# Altium PCB EVB_CAD_GC0308_V1.0.0.PcbDoc
Units mil, origin at the board's own origin, x right, y up, seen from the top; angles counter-clockwise.
Board outline 4220 x 4420 mil, 4 copper layers (Top, Inner Layer 2, Inner Layer 3, Bottom), stack 35.4 mil thick; 87 components, 82 nets, 247 pads, 224 vias.
Unrouted connection lines stored in the file: 165.
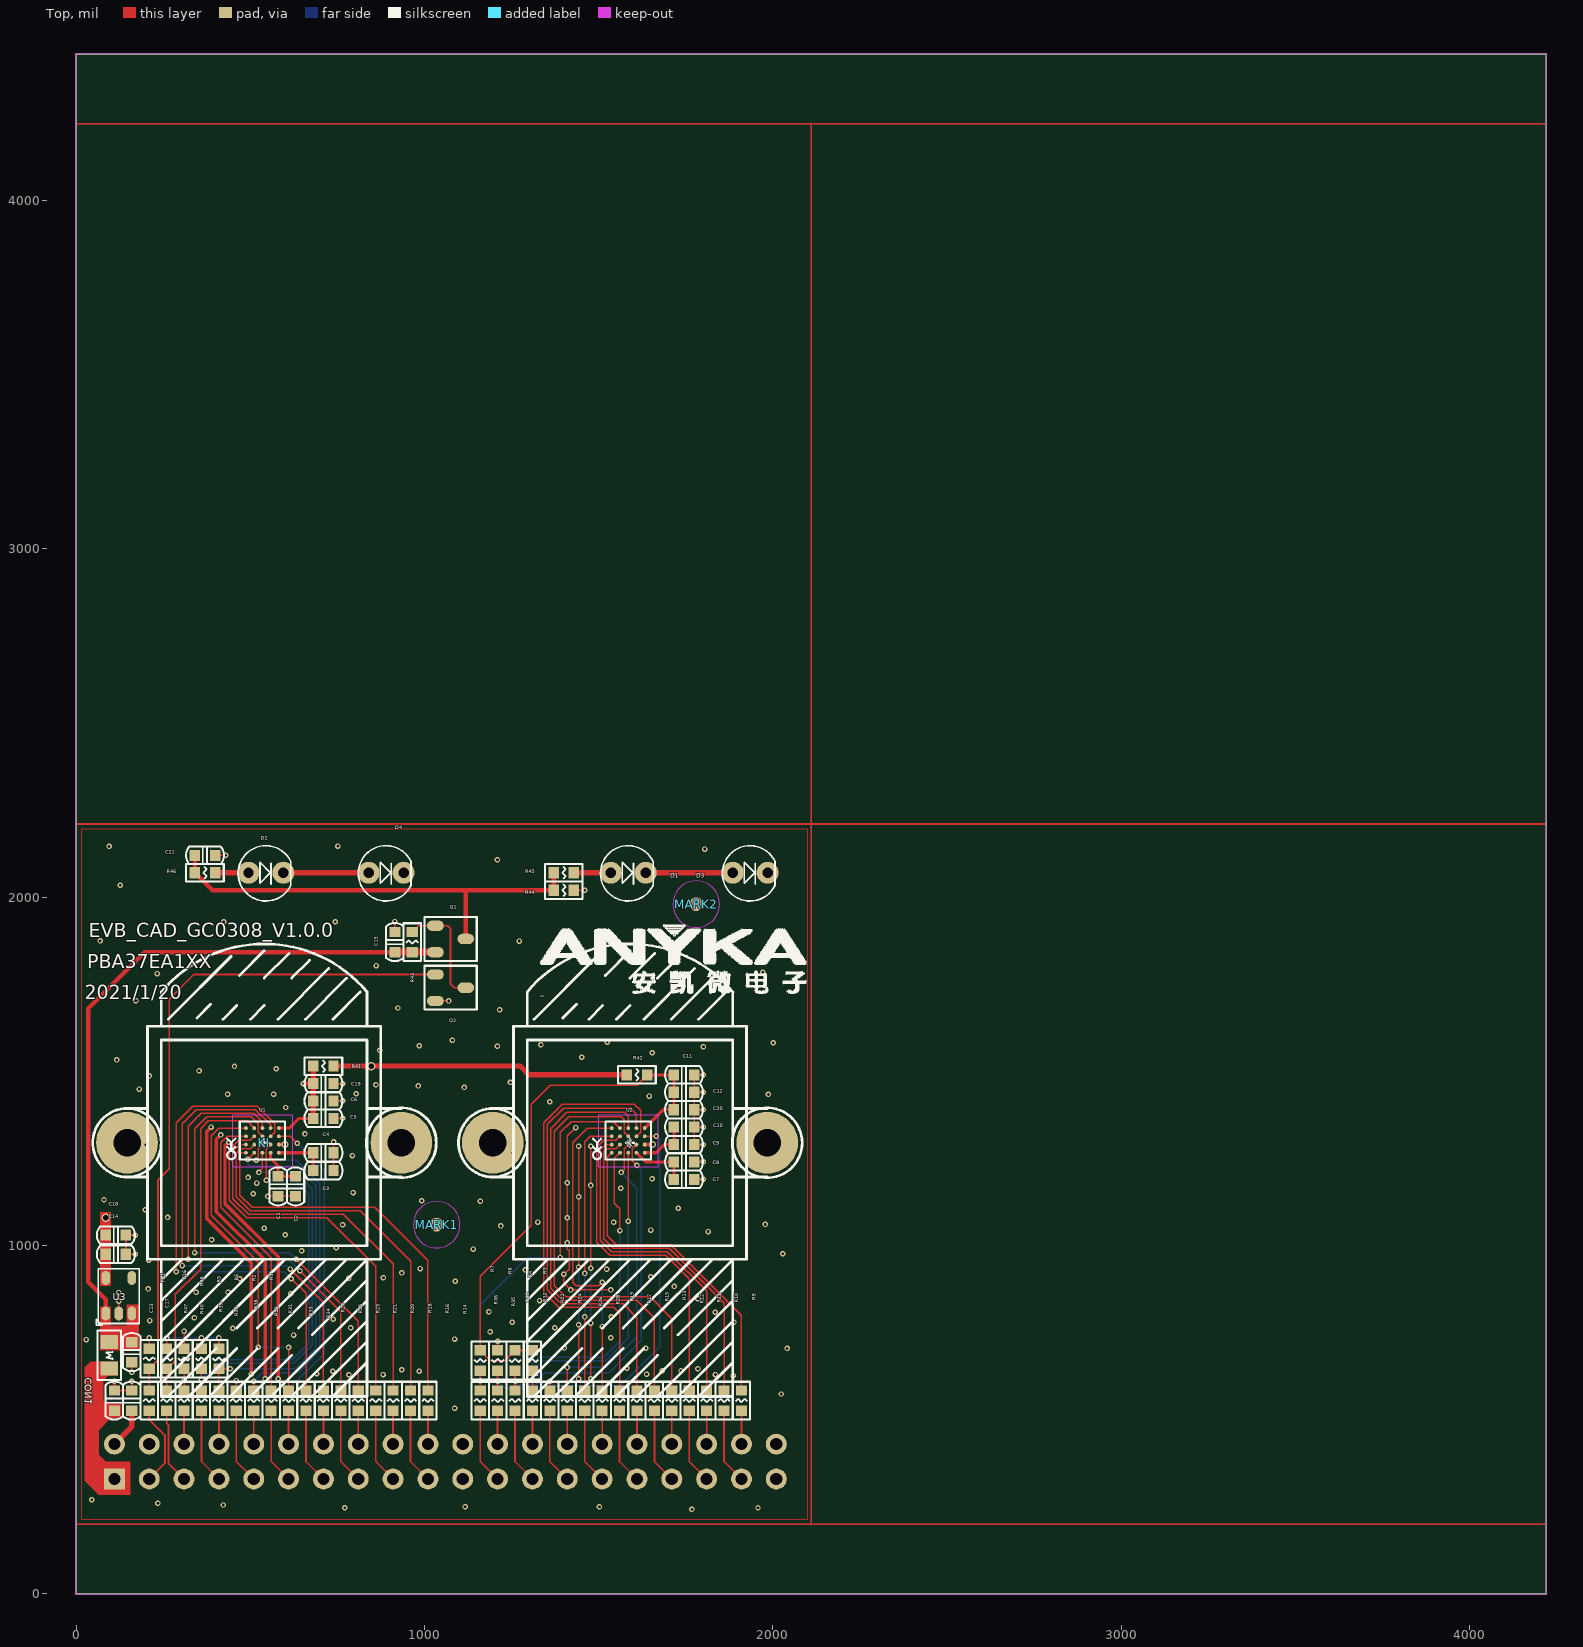
[diagram p0: Top view]
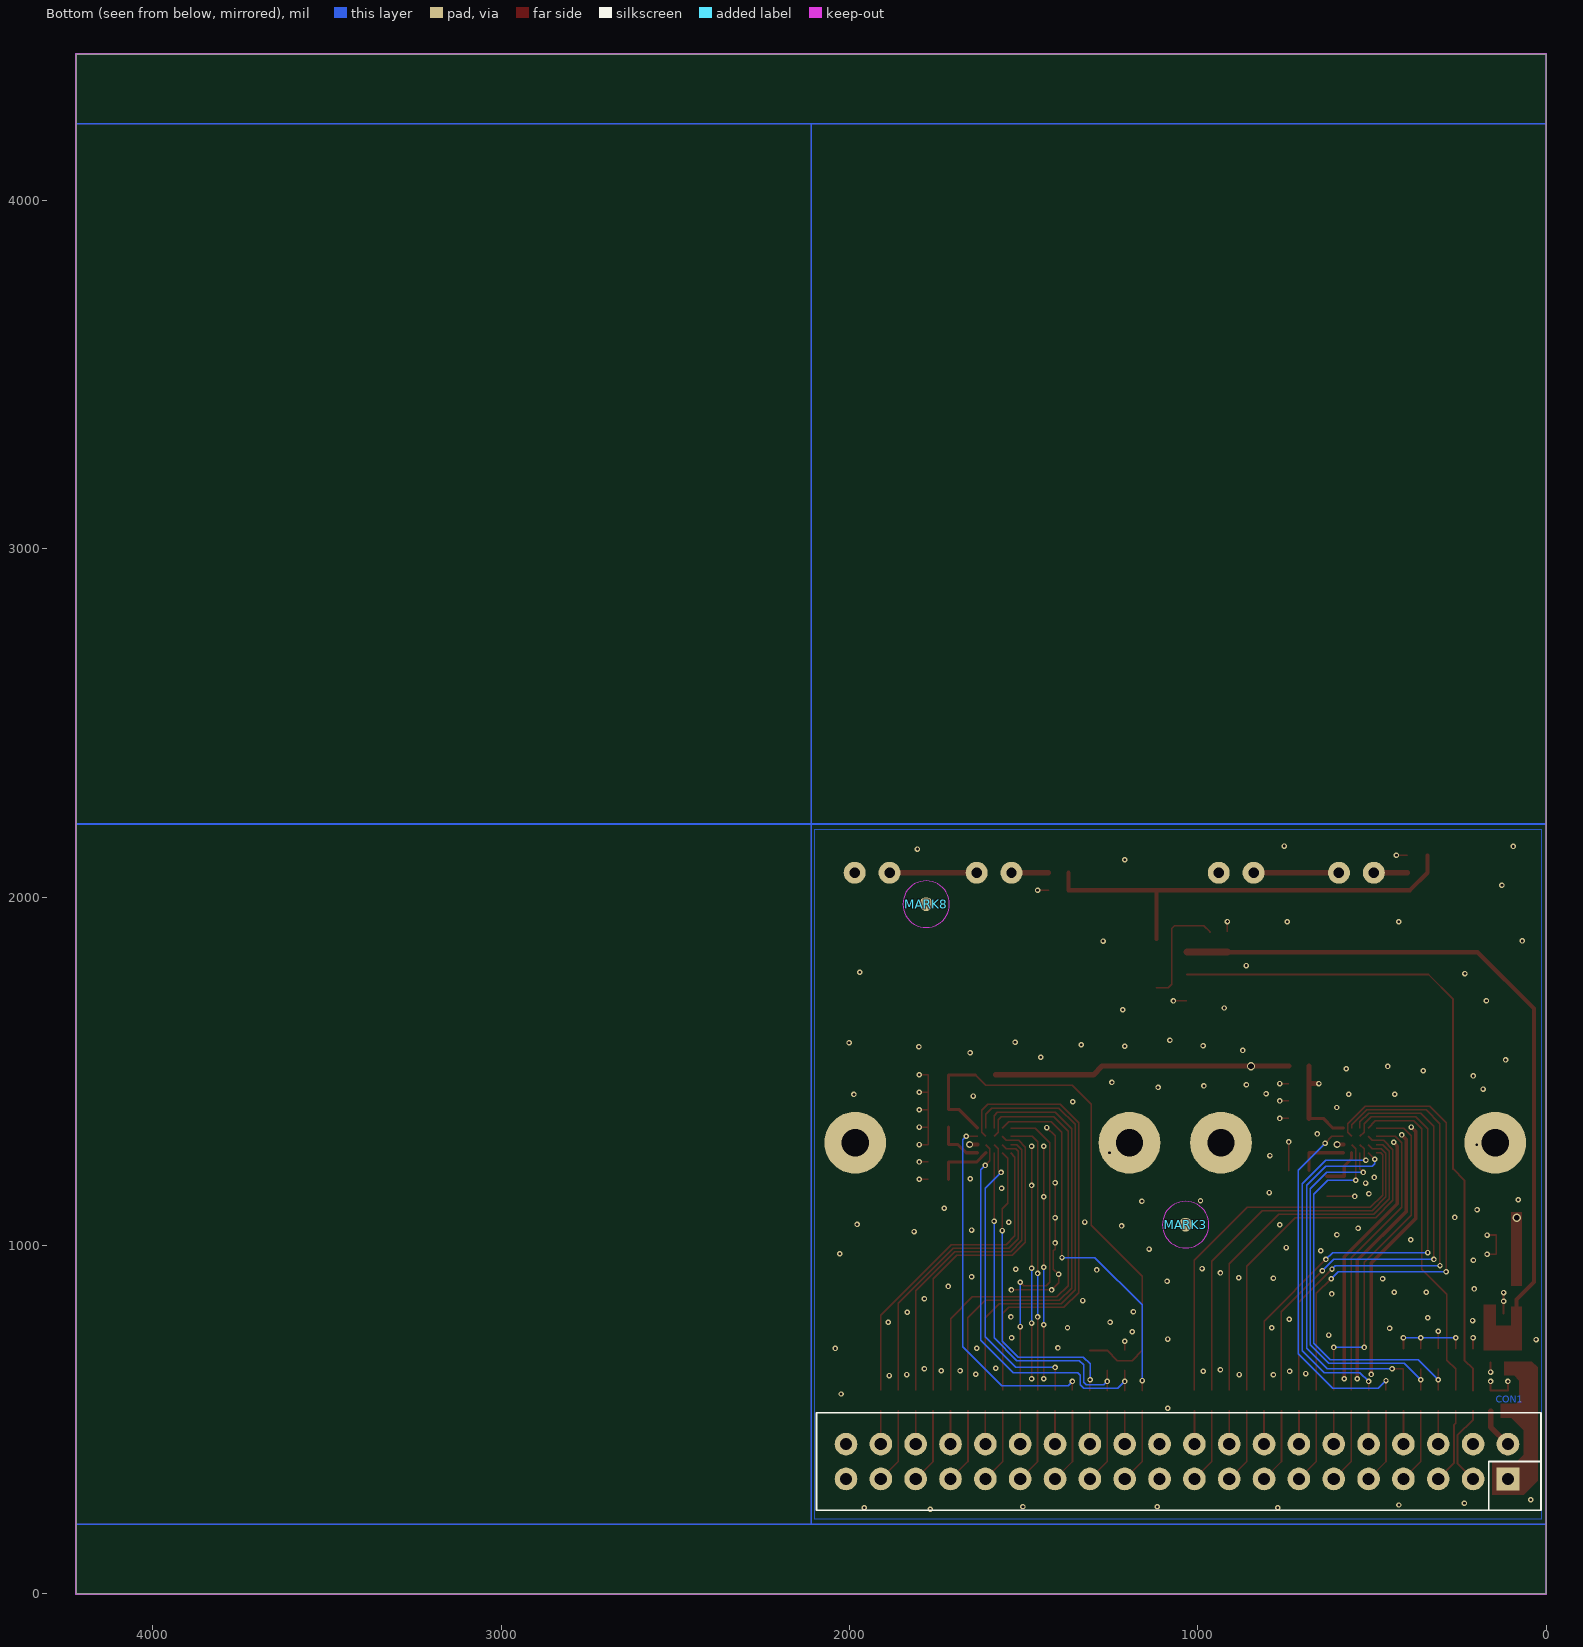
[diagram p1: Bottom view, seen from below]
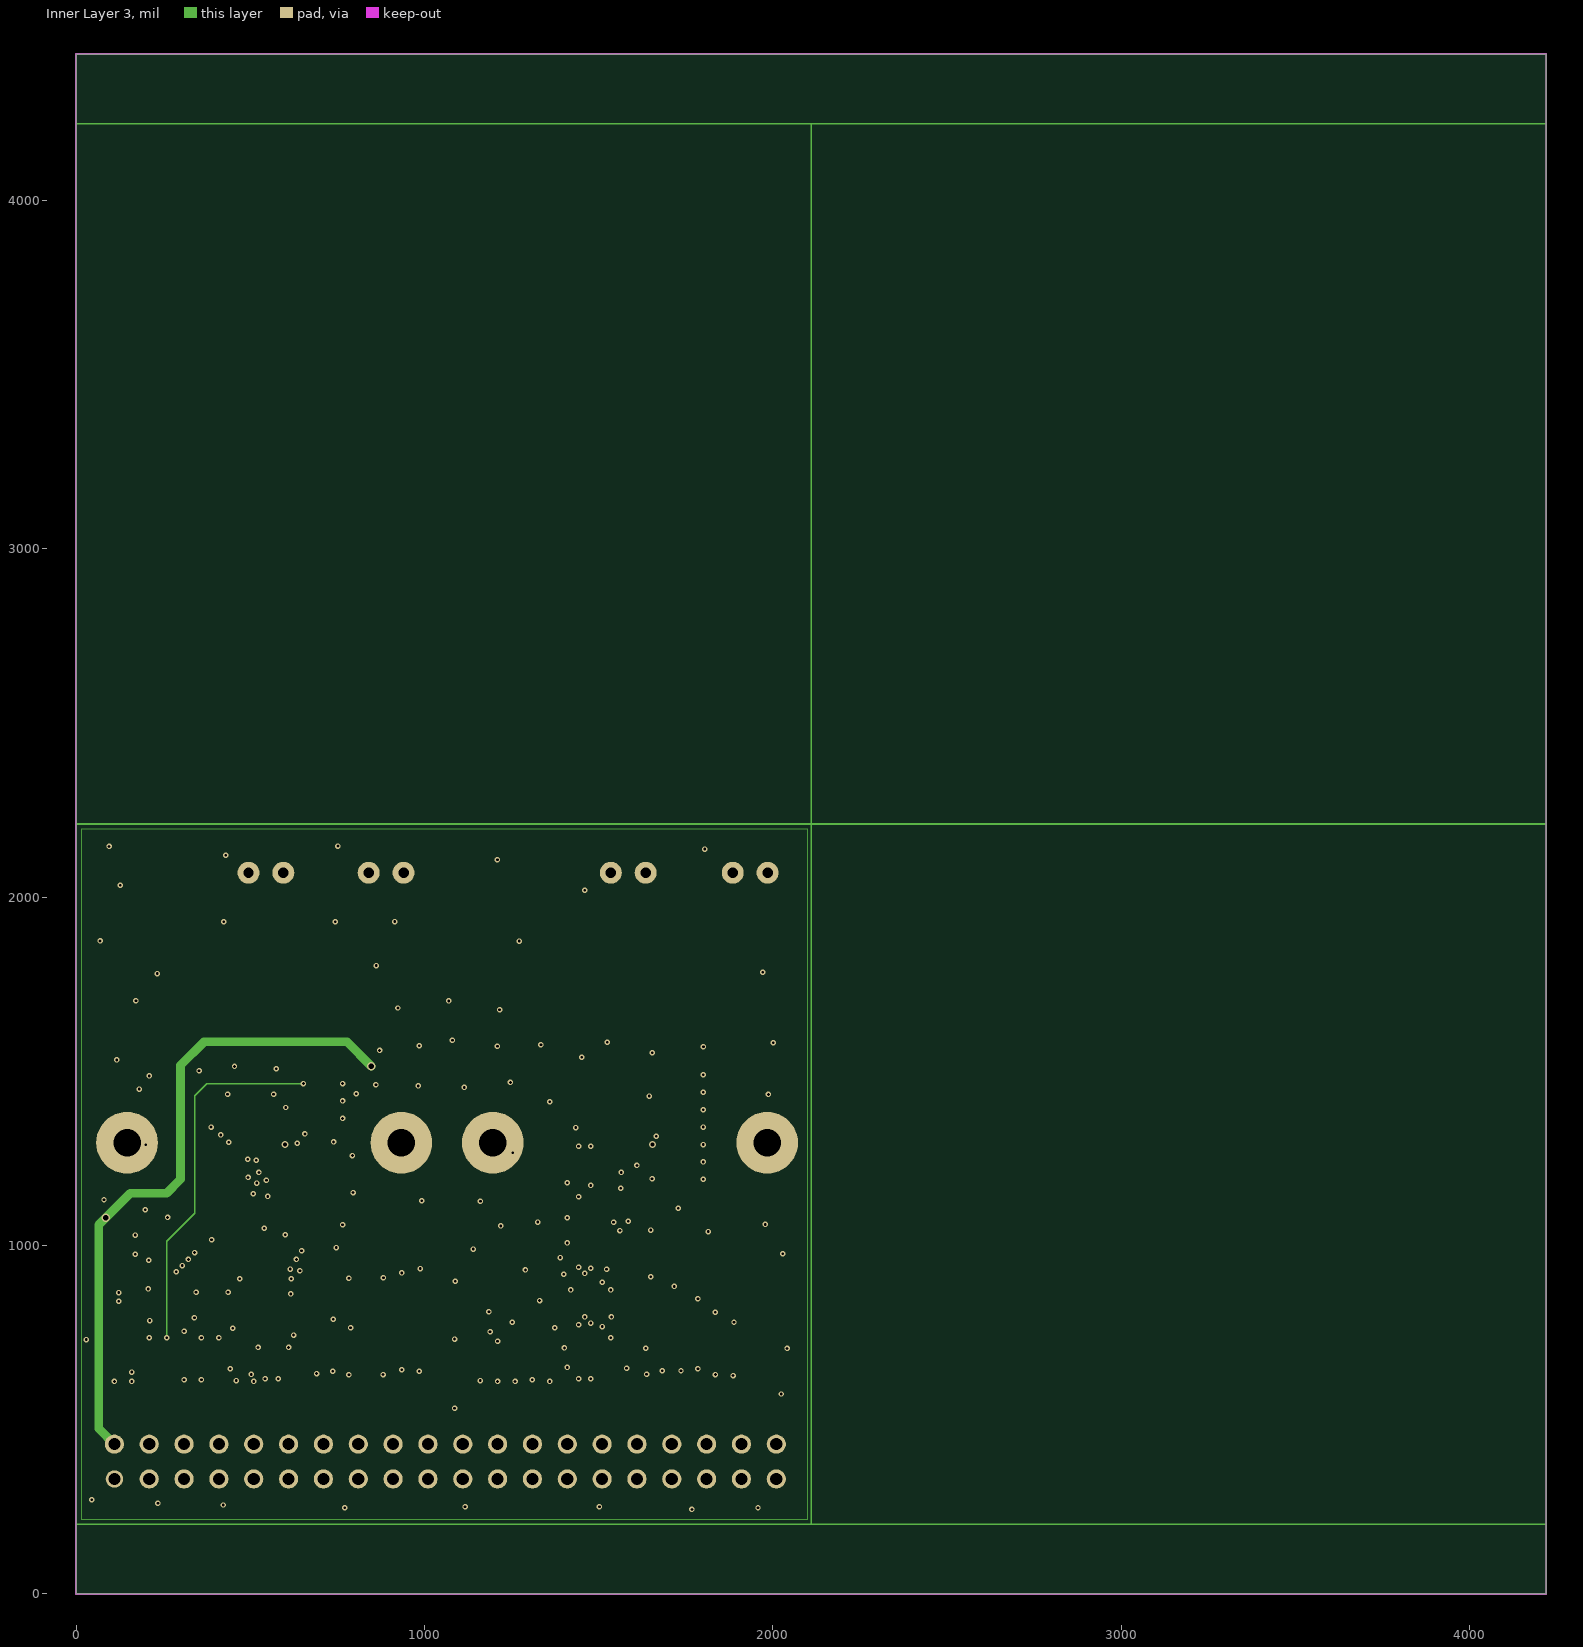
[diagram p2: Inner Layer 3]

## Layer stack, top to bottom
Solder Mask Top: solder mask 0.4, Solder Resist, Dk 3.5
Top: signal copper 1.35
Dielectric 1: dielectric 10, FR-4, Dk 4.3
Inner Layer 2: signal copper 1.35
Dielectric2: dielectric 10, FR-4, Dk 4.3
Inner Layer 3: signal copper 1.35
Dielectric3: dielectric 10, FR-4, Dk 4.3
Bottom: signal copper 1.35
Solder Mask Bottom: solder mask 0.4, Solder Resist, Dk 3.5

## Board outline
0,4420 4220,4420 4220,0 0,0

## Design rules (kind name [scope] priority, off if disabled: settings)
Clearance "Clearance - Default - DEFAULT- SMD" [IsVia vs IsSMTPin] p1: gap=0 ignorepadtopadclearanceinfootprint=FALSE
Clearance "Clearance - Default - DEFAULT - Via" [IsVia vs IsVia] p2: gap=0 ignorepadtopadclearanceinfootprint=FALSE
Clearance "Clearance - Default - DEFAULT - Net" [All] p3: gap=5 ignorepadtopadclearanceinfootprint=FALSE except(0: Arc-Hole Track-Hole SMDPad-Hole THPad-Hole Via-Hole Fill-Hole Poly-Hole Region-Hole Text-Hole; 4.5: Arc-SMDPad Track-SMDPad SMDPad-THPad; 8: THPad-Fill THPad-Poly THPad-Region Via-Fill Via-Poly Via-Region; 10: Arc-Text Track-Text SMDPad-Text THPad-Text Via-Text Fill-Text Poly-Text Region-Text Text-Text)
ComponentClearance "ComponentClearance - Default - DEFAULT" [All] p1: gap=0 collisioncheckmode=3 verticalgap=10 showdistances=FALSE
FanoutControl Fanout_Small [(CompPinCount < 5)] p3: bgadir=Out bgaviamode=Centered fanoutstyle=Auto fanoutdirection=OutThenIn viagrid=1 // Fanout_Small (Default Rule)
FanoutControl Fanout_SOIC [IsSOIC] p4: bgadir=Out bgaviamode=Centered fanoutstyle=Auto fanoutdirection=Alternating viagrid=1 // Fanout_SOIC (Default Rule)
HoleToHoleClearance "HoleToHoleClearance - Default - DEFAULT" [All] p1: gap=0 allowstackedmicrovias=TRUE
Length "Default Length" [All] p1: maxlimit=50000 minlimit=0
MaxMinImpedance "Default Impedance" [All] p1: minimum=50.00 maximum=150.0
ParallelSegment "Default Parallel Segment Adjasent" [All] p1: limit=1000 gap=200
ParallelSegment "Default Parallel Segment Same Layer" [All] p2: limit=1000 gap=200
PlaneConnect "Default PlaneConnect" [All] p1: planeconnectstyle=Direct reliefexpansion=20 reliefentries=4 reliefconductorwidth=15 reliefairgap=10
PolygonConnect "PolygonConnect - Default SMT" [IsSMTPin] p1: connectstyle=Direct reliefconductorwidth=15 reliefentries=4 polygonreliefangle="45 Angle" airgapwidth=10
PolygonConnect "PolygonConnect - Default Pad" [All] p2: connectstyle=Direct reliefconductorwidth=15 reliefentries=4 polygonreliefangle="45 Angle" airgapwidth=10
RoutingLayers "RoutingLayers - Default - DEFAULT" [All] p1: top layer_v5=TRUE mid layer 1_v5=TRUE mid layer 2_v5=TRUE bottom layer_v5=TRUE
RoutingPriority "RoutingPriority - Default - DEFAULT" [All] p1: routingpriority=3
RoutingTopology "Default Routing Topology" [All] p1: topology=Shortest
RoutingVias "RoutingVias - Default - DEFAULT" [All] p1: holewidth=7.87 width=15.75 viastyle="Through Hole" minholewidth=7.87 minwidth=15.75 maxholewidth=7.87 maxwidth=15.75
SMDToCorner "SMDToCorner - Default - DEFAULT" [All] p1: distance=0
SolderMaskExpansion [All] p1: expansion=4 istentingtop=FALSE
Width "Default Width" [All] p1: maxlimit=200 minlimit=4 preferedwidth=4
20 further rules are at their usual default settings.

## Components (designator, comment, footprint, x,y, rotation, side; value= is the part's Value field where it differs from the comment)
C1 "C0603" C0603 580,1170 r270 top
C2 "C0603" C0603 630,1170 r270 top
C3 "C0603" C0603 710,1215 r0 top
C4 "C0603" C0603 710,1266.26 r0 top
C5 "C0603" C0603 710,1365 r0 top
C6 "C0603" C0603 710,1415 r0 top
C7 "C0603" C0603 1745,1190 r0 top
C8 "C0603" C0603 1745,1240 r0 top
C9 "C0603" C0603 1745,1290 r0 top
C10 "C0603" C0603 1745,1340 r0 top
C11 "C0603" C0603 1745,1490 r0 top
C12 "C0603" C0603 1745,1440 r0 top
C13 "C0603" C0603 110,555 r270 top
C14 "C0603" C0603 114.2,975 r0 top
C15 "C0603" C0603 915,1871 r90 top
C16 "C0603" C0603 160,694 r270 top
C17 "C0603" C0603 160,555 r90 top
C18 "C0603" C0603 114.2,1030 r0 top
C19 "C0603" C0603 710,1465 r0 top
C20 "C0603" C0603 1745,1390 r0 top
C21 "C0603" C0603 370,2120 r0 top
CON1 "CON20X2_2MM54" CON20X2_2MM54 110,330 r0 top
D1 "LED_2MM54" LED_2MM54 1535,2070 r0 top
D2 "LED_2MM54" LED_2MM54 495,2070 r0 top
D3 "LED_2MM54" LED_2MM54 1885,2070 r0 top
D4 "LED_2MM54" LED_2MM54 840,2070 r0 top
FB1 "FB0805" FB0805 95,685 r270 top
K "CAMERA_COVER_YT0036A-HD+H20+IR0117" CAMERA_COVER_YT0036A-HD+H20+IR0117 1590,1295 r180 top
KI "CAMERA_COVER_YT0036A-HD+H20+IR0117" CAMERA_COVER_YT0036A-HD+H20+IR0117 540,1295 r180 top
MARK1 "MARK" MARK 1035,1060 r270 top
MARK2 "MARK" MARK 1780,1980 r270 top
MARK3 "MARK" MARK 1035,1060 r90 bottom
MARK8 "MARK" MARK 1780,1980 r90 bottom
Q1 "SOT23_GDS" SOT23_GDS 1075,1880 r270 top
Q2 "2N3904$2F$PMBT3904" 2N3904$2F$PMBT3904 1075,1740 r270 top
R1 "R0603" R0603 410,675 r90 top
R2 "R0603" R0603 360,675 r90 top
R3 "R0603" R0603 1310,670 r90 top
R4 "R0603" R0603 1260,670 r90 top
R5 "R0603" R0603 260,675 r90 top
R6 "R0603" R0603 310,675 r90 top
R7 "R0603" R0603 1160,670 r90 top
R8 "R0603" R0603 1210,670 r90 top
R9 "R0603" R0603 1910,555 r270 top
R10 "R0603" R0603 1860,555 r270 top
R11 "R0603" R0603 1810,555 r270 top
R12 "R0603" R0603 1760,555 r270 top
R13 "R0603" R0603 1710,555 r270 top
R14 "R0603" R0603 1010,555 r270 top
R15 "R0603" R0603 1660,555 r270 top
R16 "R0603" R0603 960,555 r270 top
R17 "R0603" R0603 1610,555 r270 top
R18 "R0603" R0603 910,555 r270 top
R19 "R0603" R0603 1560,555 r270 top
R20 "R0603" R0603 860,555 r270 top
R21 "R0603" R0603 810,555 r270 top
R22 "R0603" R0603 1360,555 r270 top
R23 "R0603" R0603 760,555 r270 top
R24 "R0603" R0603 1410,555 r270 top
R25 "R0603" R0603 710,555 r270 top
R26 "R0603" R0603 1460,555 r270 top
R27 "R0603" R0603 660,555 r270 top
R28 "R0603" R0603 1510,555 r270 top
R29 "R0603" R0603 460,555 r270 top
R30 "R0603" R0603 1260,555 r270 top
R31 "R0603" R0603 510,555 r270 top
R32 "R0603" R0603 1310,555 r270 top
R33 "R0603" R0603 560,555 r270 top
R34 "R0603" R0603 610,555 r270 top
R35 "R0603" R0603 1210,555 r270 top
R36 "R0603" R0603 1160,555 r270 top
R37 "R0603" R0603 360,555 r270 top
R38 "R0603" R0603 410,555 r270 top
R39 "R0603" R0603 310,555 r270 top
R40 "R0603" R0603 260,555 r270 top
R41 "R0603" R0603 710,1515 r180 top
R42 "R0603" R0603 1610,1490 r180 top
R43 "R0603" R0603 965,1871 r270 top
R44 "R0603" R0603 1400,2020 r180 top
R45 "R0603" R0603 1400,2070 r180 top
R46 "R0603" R0603 370,2070 r180 top
R47 "R0603" R0603 210,555 r270 top
R48 "R0603" R0603 210,675 r270 top
U1 "GC0308" GC0308 540,1295 r180 top
U2 "GC0308" GC0308 1590,1295 r180 top
U3 "LC1463CB5ATR18_SOT23-5" LC1463CB5ATR18_SOT23-5 122.6,855 r0 top
U4 "AK2020_LOGO" AK2020_LOGO 1333,1712.5 r0 top

## Footprints (in the part's own frame and the unit in brackets; to place one, negate y for a bottom-side part, rotate by r counter-clockwise, add the part's x,y. Pads: shape width x height; smd on the part's side, far side on the other; paste and mask are expansions set on the pad)
2N3904$2F$PMBT3904 [mil]
  oval 30x48 smd: B(-38,-43.5) C(0,43.5) E(38,-43.5)
  silkscreen extent -63,-75 63,75
AK2020_LOGO [mil]
  silkscreen extent 0,12 764,208
C0603 [mil]
  rect 30x32 smd: 1(-29,0) 2(29,0)
  silkscreen extent -55,-25 55,25
CAMERA_COVER_YT0036A-HD+H20+IR0117 [mm]
  round 4.5 hole 2: 1(-10,0) 2(10,0)
  silkscreen extent -12.55,-14.5 12.5,18.5
CON20X2_2MM54 [mil]
  rect 60x60 / inner round 50 / far side rect 65x65 hole 35: 1(0,0)
  round 60 / inner round 55 / far side round 65 hole 35: 2(0,100) 3(100,0) 4(100,100) 5(200,0) 6(200,100) 7(300,0) 8(300,100) 9(400,0) 10(400,100) 11(500,0) 12(500,100) 13(600,0) 14(600,100) 15(700,0) 16(700,100) 17(800,0) 18(800,100) 19(900,0) 20(900,100) 21(1000,0) 22(1000,100) 23(1100,0) 24(1100,100) 25(1200,0) 26(1200,100) 27(1300,0) 28(1300,100) 29(1400,0) 30(1400,100) 31(1500,0) 32(1500,100) 33(1600,0) 34(1600,100) 35(1700,0) 36(1700,100) 37(1800,0) 38(1800,100) 39(1900,0) 40(1900,100)
FB0805 [mil]
  rect 40x50 smd: 1(-38,0) 2(38,0)
  silkscreen extent -71,-34 71,34
GC0308 [mm]
  round 0.28 smd: A1(-1.07,0.73) A2(-0.47,0.73) A3(0.13,0.73) A4(0.73,0.73) A5(1.33,0.73) B1(-1.07,0.13) B2(-0.47,0.13) B3(0.13,0.13) B4(0.73,0.13) B5(1.33,0.13) C1(-1.07,-0.47) C2(-0.47,-0.47) C3(0.13,-0.47) C4(0.73,-0.47) C5(1.33,-0.47) D1(-1.07,-1.07) D2(-0.47,-1.07) D3(0.13,-1.07) D4(0.73,-1.07) D5(1.33,-1.07)
  silkscreen extent -1.52,-1.55 2.7,1.21
LC1463CB5ATR18_SOT23-5 [mil]
  oval 25x40 smd: 1(-37.4,-50) 2(0,-50) 3(37.4,-50) 4(37.4,51.97) 5(-37.4,51.97)
  silkscreen extent -65,-84 59,79
LED_2MM54 [mm]
  round 1.6 hole 0.762: A(0,0) K(2.54,0)
  silkscreen extent -0.76,-2.06 3.08,1.98
MARK [mm]
  round 1 smd: 1(0,0)
  Top keep-out region: 1.7,0 1.571,0.651 1.202,1.202 0.651,1.571 0,1.7 0,1.7 -0.651,1.571 -1.202,1.202 -1.571,0.651 -1.7,0 -1.7,0 -1.571,-0.651 -1.202,-1.202 -0.651,-1.571 0,-1.7 0,-1.7 0.651,-1.571 1.202,-1.202 1.571,-0.651 1.7,0
R0603 [mil]
  rect 30x32 smd: 1(-29,0) 2(29,0)
  silkscreen extent -54,-25 54,25
SOT23_GDS [mil]
  oval 30x48 smd: D(0,43.5) G(-38,-43.5) S(38,-43.5)
  silkscreen extent -63,-75 63,75

## Via types
v1: diameter 15.75, hole 7.87, Top to Bottom, 220 vias
v2: diameter 24, hole 16, Top to Bottom, 2 vias
v3: diameter 20, hole 12, Top to Bottom, 2 vias

## Nets (pads, with @x,y where several pads share a name; then routed paths per layer and width w, separated by ;. In a path a pad name is that pad's centre, name@x,y a point inside that pad or via, vN(x,y) a via of type N, cw(c..) or ccw(c..) an arc to the next point about the centre after c; other vN are vias at no path point)
C0_AVDD25: C3.1 C4.1 U1.A1 | length 150.1
  Top w9: U1.A1 646,1266.26 C4.1 C3.1
C0_D0: R27.1 U1.C2 | length 1468.8
  Top w4: v1(287.5,925) 287.5,1352.5 335,1400 520,1400 570.3,1349.7 570.3,1325.3 U1.C2 ; v1(617.5,905) 660,862.5 R27.1
  Bottom w4: v1(287.5,925) 597.5,925 v1(617.5,905)
C0_D1: R25.1 U1.D2 | length 1407
  Top w4: v1(305,942.5) 305,1350 345,1390 515,1390 558.5,1346.5 U1.D2 ; v1(615,932.5) 710,837.5 R25.1
  Bottom w4: v1(305,942.5) 605,942.5 v1(615,932.5)
C0_D2: R23.1 U1.D3 | length 1364.3
  Top w4: v1(322.5,960) 322.5,1342.5 360,1380 510,1380 534.88,1355.12 U1.D3 ; v1(642.5,927.5) 760,810 R23.1
  Bottom w4: v1(322.5,960) 610,960 v1(642.5,927.5)
C0_D3: R21.1 U1.C3 | length 1352.2
  Top w4: v1(340,980) 340,1335 375,1370 502.5,1370 523,1349.5 523,1325.39 U1.C3 ; v1(632.5,960) 810,782.5 R21.1
  Bottom w4: v1(340,980) 612.5,980 v1(632.5,960)
C0_D4: R20.1 U1.C4 | length 1086.9
  Top w4: U1.C4 499.51,1301.75 466.75,1301.75 440,1275 440,1130 490,1080 720,1080 860,940 R20.1
C0_D5: R18.1 U1.B5 | length 1082
  Top w4: U1.B5 469.88,1289.88 450,1270 450,1135 495,1090 767.5,1090 910,947.5 R18.1
C0_D6: R16.1 U1.B4 | length 1134.2
  Top w4: U1.B4 499.38,1278 473,1278 460,1265 460,1140 500,1100 815,1100 960,955 R16.1
C0_D7: R14.1 U1.A5 | length 1127.2
  Top w4: U1.A5 475,1266.26 470,1261.26 470,1145 505,1110 857.64,1110 1010,957.64 R14.1
C0_DVDD: C5.1 C6.1 C19.1 R1.2 R2.2 R5.2 R41.2 U1.D1 | length 1587.1
  Top w5: R5.2 v1(260,735) ; R2.2 v1(360,735) ; R1.2 v1(410,735)
  Top w9: U1.D1 612.13,1337.13 640,1365 C5.1
  Top w15: v1(652.5,1465) C19.1 ; C5.1 C6.1 C19.1 ; R41.2 C19.1
  Inner Layer 3 w4: v1(260,735) 260,1012.5 340,1092.5 340,1430 375,1465 v1(652.5,1465)
  Bottom w5: v1(260,735) v1(360,735) v1(410,735)
C0_HSYNC: R31.1 U1.B3 | length 994.8
  Top w4: R31.1 v1(510,610) ; v1(517.5,1245) 523,1250.5 523,1277.55 534.88,1289.43 U1.B3
  Bottom w4: v1(510,610) 535,635 637.5,635 700,697.5 700,1177.5 632.5,1245 v1(517.5,1245)
C0_PCLK: R33.1 U1.C5 | length 851.4
  Top w4: U1.C5 433.5,1313.5 415,1295 415,1110 560,965 R33.1
C0_PWDN: R6.1 R39.1 U1.B2 | length 1135.4
  Top w4: R39.1 v1(310,615) R6.1 ; v1(546.5,1187.5) 546.5,1277.88 U1.B2
  Bottom w4: v1(310,615) 367.5,672.5 620,672.5 667.5,720 667.5,1147.5 627.5,1187.5 v1(546.5,1187.5)
C0_RESET: R5.1 R40.1 U1.D4 | length 963.5
  Top w4: R40.1 R5.1 284,670 285,670 285,860 357.5,932.5 357.5,1335 380,1357.5 490.89,1357.5 U1.D4
C0_SCL: R1.1 R38.1 U1.A4 | length 1091.4
  Top w4: R38.1 R1.1 v1(442.5,646) ; v1(492.5,1247.5) U1.A4
  Bottom w4: v1(442.5,646) 628.5,646 687.5,705 687.5,1172.5 632.5,1227.5 500,1227.5 492.5,1235 v1(492.5,1247.5)
C0_SCLK: R34.1 U1.D5 | length 983.7
  Top w4: U1.D5 409.63,1337.13 387.5,1315 387.5,1087.5 522.5,952.5 v1(522.5,707.5) ; R34.1 v1(610,707.5)
  Bottom w4: v1(522.5,707.5) v1(610,707.5)
C0_SDA: R2.1 R37.1 U1.A3 | length 1100.9
  Top w4: R37.1 v1(360,615) R2.1 ; v1(525,1210) 534.88,1219.88 U1.A3
  Bottom w4: v1(360,615) 407.5,662.5 625,662.5 677.5,715 677.5,1162.5 630,1210 v1(525,1210)
C0_VREF: C1.1 C2.1 U1.A2 | length 126.2
  Top w9: U1.A2 558.5,1250 580,1228.5 C1.1 C2.1
C0_VSYNC: R29.1 U1.C1 | length 1028.5
  Top w4: R29.1 v1(460,612.5) ; U1.C1 615,1313.5 v1(635,1293.5)
  Bottom w4: v1(460,612.5) 482.5,590 612.5,590 712.5,690 712.5,1216 v1(635,1293.5)
C1_AVDD25: C9.1 C10.1 U2.A1 | length 143.7
  Top w9: U2.A1 1665,1266.26 1688.74,1290 C9.1 C10.1
C1_D0: R19.1 U2.C2 | length 1338.6
  Top w4: R19.1 1560,806 1543.5,822.5 1385,822.5 1342.5,865 1342.5,1353 1395.5,1406 1602.5,1406 1620.2,1388.3 1620.2,1325.2 U2.C2
C1_D1: R17.1 U2.D2 | length 1297
  Top w4: U2.D2 1608.5,1377.5 1591.5,1394.5 1399.5,1394.5 1352.5,1347.5 1352.5,872.5 1392.5,832.5 1570,832.5 1610,792.5 R17.1
C1_D2: R15.1 U2.D3 | length 1280.2
  Top w4: U2.D3 1584.88,1372.5 1575.38,1382 1409,1382 1362.5,1335.5 1362.5,877.5 1397.5,842.5 1610,842.5 1660,792.5 R15.1
C1_D3: R13.1 U2.C3 | length 1298.8
  Top w4: U2.C3 1573.1,1325.29 1573.1,1360.9 1565,1369 1414,1369 1372.5,1327.5 1372.5,885 1405,852.5 1647.5,852.5 1710,790 R13.1
C1_D4: R12.1 U2.C4 | length 981.1
  Top w4: U2.C4 1549.76,1302 1514.5,1302 1495,1282.5 1495,1010 1532.5,972.5 1692.5,972.5 1760,905 R12.1
C1_D5: R11.1 U2.B5 | length 949.9
  Top w4: U2.B5 1519.88,1289.88 1505,1275 1505,1015 1537.5,982.5 1697.5,982.5 1810,870 R11.1
C1_D6: R10.1 U2.B4 | length 977.1
  Top w4: U2.B4 1549.38,1278 1523,1278 1515,1270 1515,1020 1542.5,992.5 1702.5,992.5 1860,835 R10.1
C1_D7: R9.1 U2.A5 | length 939.2
  Top w4: U2.A5 1525,1253.62 1525,1027.5 1550,1002.5 1707.5,1002.5 1910,800 R9.1
C1_DVDD: C11.1 C12.1 C20.1 R3.2 R4.2 R7.2 R42.1 U2.D1 | length 1591.5
  Top w4: R4.2 1231,670 1189,670 R7.2 1160,912 1306,1058 1306,1405 1361,1460 1609,1460 R42.1
  Top w5: R4.2 R3.2
  Top w9: U2.D1 1685,1390 C20.1 C12.1 C11.1 R42.1
C1_HSYNC: R24.1 U2.B3 | length 881.5
  Top w4: R24.1 v1(1410,650) ; v1(1565,1210) 1573,1218 1573,1278 U2.B3
  Bottom w4: v1(1410,650) 1522.5,650 1610,737.5 1610,1165 v1(1565,1210)
C1_PCLK: R26.1 U2.C5 | length 797.8
  Top w4: R26.1 v1(1460,795) ; v1(1460,920) 1460,1297.5 1476,1313.5 U2.C5
  Bottom w4: v1(1460,795) v1(1460,920)
C1_PWDN: R8.1 R35.1 U2.B2 | length 1128.8
  Top w4: U2.B2 1596.75,1278.13 1596.75,1243.25 v1(1610,1230)
  Top w5: R35.1 v1(1210,610) R8.1
  Bottom w4: v1(1210,610) 1230,590 1327.5,590 1337.5,600 1337.5,627.5 1345,635 1530,635 1622.5,727.5 1622.5,1217.5 v1(1610,1230)
C1_RESET: R7.1 R36.1 U2.D4 | length 1112
  Top w4: v1(1390,965.5) 1390,1325 1421,1356 1542.39,1356 U2.D4
  Top w5: R36.1 v1(1160,612.5) R7.1
  Bottom w4: v1(1160,612.5) 1160,830 1295.5,965.5 v1(1390,965.5)
C1_SCL: R3.1 R32.1 U2.A4 | length 934.8
  Top w4: v1(1561.26,1043) 1561.26,1105 1545,1121.26 1545,1250 U2.A4
  Top w5: R32.1 R3.1
  Bottom w4: v1(1309.5,615) 1309.5,660 1329.5,680 1515.26,680 1561.26,726 v1(1561.26,1043)
C1_SCLK: R28.1 U2.D5 | length 934.4
  Top w4: R28.1 v1(1510,767.5) ; v1(1510,895) 1500,885 1435,885 1425,895 1425,1295 1467.13,1337.13 U2.D5
  Bottom w4: v1(1510,767.5) v1(1510,895)
C1_SDA: R4.1 R30.1 U2.A3 | length 1002.6
  Top w4: v1(1584.88,1070) U2.A3
  Top w5: R30.1 v1(1260,610) R4.1
  Bottom w4: v1(1260,610) 1270,600 1320,600 1327.5,607.5 1327.5,657.5 1340,670 1520,670 1584.88,734.88 v1(1584.88,1070)
C1_VREF: C7.1 C8.1 U2.A2 | length 168.4
  Top w9: U2.A2 1634.76,1240 C8.1 C7.1
C1_VSYNC: R22.1 U2.C1 | length 1033.3
  Top w4: R22.1 v1(1360,610) ; U2.C1 v1(1665,1313.5)
  Bottom w4: v1(1360,610) 1372.5,597.5 1562.5,597.5 1675,710 1675,1303.5 v1(1665,1313.5)
CSI0_D0: CON1.13 R27.2 | length 216.7
  Top w5: R27.2 660,380 CON1.13
CSI0_D1: CON1.14 R25.2 | length 96
  Top w5: CON1.14 R25.2
CSI0_D2: CON1.15 R23.2 | length 216.7
  Top w5: R23.2 760,380 CON1.15
CSI0_D3: CON1.16 R21.2 | length 96
  Top w5: CON1.16 R21.2
CSI0_D4: CON1.17 R20.2 | length 216.7
  Top w5: R20.2 860,380 CON1.17
CSI0_D5: CON1.18 R18.2 | length 96
  Top w5: CON1.18 R18.2
CSI0_D6: CON1.19 R16.2 | length 216.7
  Top w5: R16.2 960,380 CON1.19
CSI0_D7: CON1.20 R14.2 | length 96
  Top w5: CON1.20 R14.2
CSI0_HSYNC: CON1.10 R31.2 | length 96
  Top w5: CON1.10 R31.2
CSI0_I2C_SCL: CON1.8 R38.2 | length 96
  Top w5: CON1.8 R38.2
CSI0_I2C_SDA: CON1.7 R37.2 | length 216.7
  Top w5: R37.2 360,380 CON1.7
CSI0_PCLK: CON1.11 R33.2 | length 216.7
  Top w5: R33.2 560,380 CON1.11
CSI0_PDWN: CON1.6 R39.2 | length 96
  Top w5: CON1.6 R39.2
CSI0_REST: CON1.5 R40.2 | length 216.7
  Top w5: R40.2 260,490 265,485 265,375 CON1.5
CSI0_SCLK: CON1.12 R34.2 | length 96
  Top w5: CON1.12 R34.2
CSI0_VSYNC: CON1.9 R29.2 | length 216.7
  Top w5: R29.2 460,380 CON1.9
CSI1_D0: CON1.31 R19.2 | length 216.7
  Top w5: R19.2 1560,380 CON1.31
CSI1_D1: CON1.32 R17.2 | length 96
  Top w5: CON1.32 R17.2
CSI1_D2: CON1.33 R15.2 | length 216.7
  Top w5: R15.2 1660,380 CON1.33
CSI1_D3: CON1.34 R13.2 | length 96
  Top w5: CON1.34 R13.2
CSI1_D4: CON1.35 R12.2 | length 216.7
  Top w5: R12.2 1760,380 CON1.35
CSI1_D5: CON1.36 R11.2 | length 96
  Top w5: CON1.36 R11.2
CSI1_D6: CON1.37 R10.2 | length 216.7
  Top w5: R10.2 1860,380 CON1.37
CSI1_D7: CON1.38 R9.2 | length 96
  Top w5: CON1.38 R9.2
CSI1_HSYNC: CON1.28 R24.2 | length 96
  Top w5: CON1.28 R24.2
CSI1_I2C_SCL: CON1.26 R32.2 | length 96
  Top w5: CON1.26 R32.2
CSI1_I2C_SDA: CON1.25 R30.2 | length 216.7
  Top w5: R30.2 1260,380 CON1.25
CSI1_PCLK: CON1.29 R26.2 | length 216.7
  Top w5: R26.2 1460,380 CON1.29
CSI1_PDWN: CON1.24 R35.2 | length 96
  Top w5: CON1.24 R35.2
CSI1_REST: CON1.23 R36.2 | length 216.7
  Top w5: R36.2 1160,380 CON1.23
CSI1_SCLK: CON1.30 R28.2 | length 96
  Top w5: CON1.30 R28.2
CSI1_VSYNC: CON1.27 R22.2 | length 216.7
  Top w5: R22.2 1360,380 CON1.27
GND: C1.2 C2.2 C3.2 C4.2 C5.2 C6.2 C7.2 C8.2 C9.2 C10.2 C11.2 C12.2 C13.1 C14.2 C15.2 C16.2 C17.2 C18.2 C19.2 C20.2 C21.2 CON1.21 CON1.22 CON1.39 CON1.40 D3.K D4.K K.1 K.2 KI.1 KI.2 Q2.E R6.2 R8.2 R44.1 R48.1 U1.B1 U2.B1 U3.2 | length 5433.3
  Top w4: R6.2 v1(310,754) ; v1(550,1141) C1.2 C2.2 ; C4.2 v1(739,1297.5) ; C5.2 v1(765,1365) ; C6.2 v1(765,1415) ; C19.2 v1(765,1465) ; C15.2 v1(915,1930) ; Q2.E v1(1070,1702) ; R8.2 v1(1210,725) ; v1(1434.13,1338.64) 1410,1314.51 v1(1410,1180) v1(1410,1080) v1(1410,1007.5) 1410,990 1415,985 1415,932.5 v1(1400,917.5) 1400,892.5 v1(1420,872.5) v1(1535,872.5) ; v1(1442.5,617.5) v1(1442.5,772.5) ; v1(1442.5,937.5) v1(1442.5,1140) v1(1442.5,1285) ; v1(1477.5,617.5) v1(1477.5,777.5) ; v1(1477.5,935) v1(1477.5,1172.5) v1(1477.5,1285) ; C7.2 v1(1800,1190) ; C8.2 v1(1800,1240) ; v1(1800,1290) C9.2 C10.2 ; v1(1800,1340) C10.2 ; v1(1800,1390) C20.2 ; v1(1800,1440) C12.2 ; v1(1800,1490) C11.2 C12.2 ; C10.2 C20.2 ; C20.2 C12.2
  Top w5: v1(110,610) C13.1 C17.2 v1(160,610) ; U3.2 v1(122.6,840) v1(122.6,865) ; v1(160,637) C16.2 ; v1(170,975) C14.2 C18.2 v1(170,1030) ; R48.1 v1(210,735) ; C21.2 v1(430,2120) ; C3.2 C4.2 ; R44.1 v1(1460,2020)
  Top w10: KI.2@199.69,1275.31 v1(199.75,1289) ; v1(387.5,1340) 375,1327.5 375,1320 375,1077.5 502.5,950 v1(502.5,630) ; v1(415,1317.5) 402.5,1305 402.5,1097.5 542.5,957.5 v1(542.5,617.5) ; v1(438.1,1296.32) 427.5,1285.72 427.5,1120 580,967.5 v1(580,617.5)
  Top w12: U1.B1 v3(600,1289.88) ; U2.B1 v3(1655,1289.88)
  Bottom w4: v1(1442.5,772.5) v1(1442.5,937.5) ; v1(1477.5,777.5) v1(1477.5,935)
  other v1: 1767.87,242.54 770.87,247.35 1957.43,247.57 1116.54,250.55 1502.22,250.55 422.8,255.27 235,260 44.84,270.11 1086.3,533.23 2024.06,573.9 1885.73,626.81 783.16,629.21 881.27,629.75 1637.63,630.44 1835.33,629.61 690.45,632.45 736.8,638.92 984.76,639.46 1682.44,640.5 1736.38,640.81 935.17,643.23 1784.92,646.41 1580.03,647.81 1635,705 2040.79,704.74 1401.71,706.14 29.12,730.13 1086.3,731.59 1534.77,735.41 624.4,742.93 1188.44,752.83 449.65,762.76 788.01,763.97 1374.2,764.03 1251.92,779.9 1888.53,779.9 211.43,784.64 737.88,788.23 339.82,792.57 1536.73,794.96 1834.39,808.83 1185,810 1330.29,842.16 1784.92,847.11 615.9,861 344.29,865.94 436.43,865.72 206.97,875.36 1716.78,882.58 1088.56,897.51 470,905 783.09,906.34 882.35,907.9 1649.57,910.58 935.17,921.37 1290,930 1522.62,932.05 988,933.77 208.95,957.65 2028.25,976.52 647.12,985.35 1140,990 746.57,994.3 388.9,1016.64 600.78,1031.02 1814.72,1040.22 1649.72,1044.28 540.3,1049.55 1219.03,1056.3 765,1060 1978.19,1060.64 1325,1067.5 1542.83,1067.04 262.8,1080.72 198.69,1102.86 1728.15,1106.87 1160.65,1126.97 992.46,1128.3 80.18,1131.61 508.87,1148.62 794.95,1152.08 1563.56,1164.57 518.49,1179.3 1653.38,1191.4 493.83,1195.55 793.12,1258.15 1253.41,1266.29 657.06,1320.31 601.68,1396.26 1359.39,1412.71 1645.05,1429.21 434.83,1434.41 566.75,1434.41 1987.34,1433.71 804.21,1435.7 181.5,1449.11 1114.39,1453.72 982.47,1458.22 860.7,1461.41 1246.68,1468.03 209.7,1486.71 352.93,1501.48 574.26,1507.13 454.78,1514.21 116.92,1532.91 1451.15,1540.44 1653.95,1553.54 871.14,1559.9 1800.8,1570.88 1209.61,1572.34 985.22,1573.68 1334.45,1576.36 2001.25,1581.78 1524.65,1583.68 1080.25,1589.16 1215.58,1676.95 923.98,1681.87 171.75,1702.58 233.38,1780.76 1970.71,1784.66 861.35,1803.69 68.92,1874.46 1272.11,1874.06 423.77,1929.28 743.73,1929.28 127.06,2034.5 1209.63,2107.13 1804.92,2138.05 94.83,2145.58 751.71,2146.57
LED_CON: CON1.3 R47.2 | length 233.3
  Top w5: CON1.3 255,375 255,455 210,500 R47.2
NETC13_2: C13.2 CON1.1 FB1.2 | length 432.4
  Top w5: FB1.2 50,602 50,541 65,526 C13.2 55,471 55,385 CON1.1
NETC21_1: C21.1 Q1.D R44.2 R45.2 R46.2 | length 1292.2
  Top w12: C21.1 R46.2 391,2020 1120,2020 ; Q1.D 1118.5,2020 1120,2020 ; R45.2 R44.2 1120,2020
NETD1_A: D1.A R45.1 | length 106
  Top w15: R45.1 D1.A
NETD1_K: D1.K D3.A | length 250
  Top w15: D1.K D3.A
NETD2_A: D2.A R46.1 | length 96
  Top w15: R46.1 D2.A
NETD2_K: D2.K D4.A | length 245
  Top w15: D2.K D4.A
NETQ1_G: Q1.G Q2.C R43.1 | length 328.4
  Top w5: R43.1 983,1918 Q1.G 1067,1918 1075,1910 1075,1750 1085,1740 Q2.C
NETQ2_B: Q2.B R47.1 R48.2 | length 1940.5
  Top w5: R47.1 R48.2 235,671 235,1187.5 267.5,1220 267.5,1707.5 338,1778 Q2.B
POWER_IN: C15.1 C16.1 FB1.1 Q1.S R43.2 U3.1 U3.3 | length 2219.9
  Top w5: U3.1 85.2,770.8 96,760 160,760 ; FB1.1 C16.1 160,760 ; U3.3 160,760
  Top w12: U3.1 85.2,845 35,895.2 35,1680 197,1842 C15.1
  Top w20: C15.1 R43.2 Q1.S
VDDIO: C14.1 C17.1 C18.1 CON1.2 R41.1 R42.2 U3.5 | length 3011.4
  Top w5: U3.5 C14.1 C18.1 ; C17.1@159.59,525.21 C17.1
  Top w15: CON1.2 159.59,479.59 C17.1@159.59,525.21 ; R41.1 v2(847.5,1515) 1275,1515 1300,1490 R42.2
  Top w25: C18.1 v2(85.2,1080)
  Inner Layer 3 w25: CON1.2 65,475 65,1059.8 v2(85.2,1080) 155.2,1150 260,1150 300,1190 300,1517.5 367.5,1585 777.5,1585 v2(847.5,1515)
pads on no net: CON1.4 MARK1.1 MARK2.1 MARK3.1 MARK8.1 U3.4

## Polygon pours and split planes (outlines as drawn)
GND on Inner Layer 3 (solid, remove dead copper, pour order 0): 15,215 2100,215 2100,2195 15,2195
GND on Bottom (solid, remove dead copper, pour order 1): 15,215 2100,215 2100,2195 15,2195
GND on Top (solid, remove dead copper, pour order 2): 15,215 2100,215 2100,2195 15,2195
GND on Inner Layer 2 (solid, remove dead copper, pour order 3): 15,215 2100,215 2100,2195 15,2195

## Keep-outs
Top:
  region: 450,1375 620,1375 620,1225 450,1225 450,1375
  region: 1500,1375 1670,1375 1670,1225 1500,1225 1500,1375
Keep-Out Layer:
  the board outline again, w5

## Other copper
Top:
  region net POWER_IN: 145,830 180,830 180,700 70,700 70,825 100,825 100,770 145,770 145,830
  region net NETC13_2: 42,667 120,667 120,627 92,627 77.5,612.5 77.5,555 86.25,546.25 130,546.25 130,505 100,505 65,470 65,400 85,380 155,380 155,285 65,285 25,325 25,650 42,667
  region net VDDIO: 70,1095 100,1095 100,885 70,885 70,1095
Multi-Layer:
  lines w5: 0,200 0,0 4220,0 4220,200 ; 0,200 4220,200 ; 0,200 0,2210 ; 0,200 2110,200 ; 0,2210 0,4220 ; 0,2210 2110,2210 ; 0,2210 2110,2210 ; 0,4220 0,4420 4220,4420 4220,4220 ; 0,4220 4220,4220 ; 0,4220 2110,4220 ; 2110,200 2110,2210 ; 2110,200 2110,2210 ; 2110,200 4220,200 ; 2110,2210 2110,4220 ; 2110,2210 4220,2210 ; 2110,2210 2110,4220 ; 2110,2210 4220,2210 ; 2110,4220 4220,4220 ; 4220,200 4220,2210 ; 4220,2210 4220,4220
  text "_ _ _V_CUT" at 4221,4232.5 h50
  text "_ _ _V_CUT" at 2097.5,4226 h50 r90
  text "_ _ _V_CUT" at 4221,2222.5 h50
  text "_ _ _V_CUT" at 4220,212.5 h50
  text "_ _ _V_CUT" at 2122.5,195 h50 r270

## Silkscreen, mask and mechanical layers (free items; w line width, h text height)
Silkscreen Top:
  text "EVB_CAD_GC0308_V1.0.0" at 36.25,1884.5 h40
  text "PBA37EA1XX" at 32.75,1796.25 h40
  text "2021/1/20" at 25,1706.5 h40
Silkscreen Bottom:
  lines w5: 15,240 15,520 2095,520 2095,240 15,240 ; 15,240 15,380 165,380 165,240 15,240